# EAGLE board simdash (EAGLE 9.7.0)

Size 165.56 x 157.79 mm. Coordinates in mm from the lower left corner, seen from the top.
Outline: 0,0 165.56,0 165.56,157.79 0,157.79 0,0
Copper layers (1*16): Top 0.035mm / dielectric 1.5mm / Bottom 0.035mm
Design rules "default": minimum track width 6mil, minimum drill 0.35mm, track to track 6mil, track to pad 6mil, pad to pad 6mil, via to via 6mil, smd to smd 6mil, copper to edge 40mil, drill to drill 6mil, minimum pad ring 10mil, minimum via ring 8mil, stop-mask expansion 4mil, vias tented up to drill 0mil, thermal gap 10mil

## Footprints (pad centres in the part's own frame; a part is rotated, then mirrored left to right if it is on the bottom)
DIODE-AXIAL = drill 1: 1 -5.08,0; 2 5.08,0
7SEG-13 = drill 0.813 long: 1 -5.08,-7.62; 2 -2.54,-7.62; 3 0,-7.62; 4 2.54,-7.62; 5 5.08,-7.62; 6 5.08,7.62; 7 2.54,7.62; 8 0,7.62; 9 -2.54,7.62; 10 -5.08,7.62
MOTOR = drill 1.118 pad 3.15 octagon: + 2.54,0; - -2.54,0
RESAD1016W63L850D250B = drill 0.83 pad 1.43: 1 -5.08,0; 2 5.08,0
TO92 = drill 0.813 octagon: 1 -1.27,0; 2 0,1.905; 3 1.27,0
ARDUINO-UNO-R3-SHIELD = drill 1.016 pad 1.88: 3.3V 24.13,-2.54; 5V 24.13,0; A0 24.13,12.7; A1 24.13,15.24; A2 24.13,17.78; A3 24.13,20.32; A4 24.13,22.86; A5 24.13,25.4; AREF -24.13,-13.97; D2 -24.13,20.32; D3 -24.13,17.78; D4 -24.13,15.24; D5 -24.13,12.7; D6 -24.13,10.16; D7 -24.13,7.62; D8 -24.13,3.81; D9 -24.13,1.27; D10 -24.13,-1.27; D11 -24.13,-3.81; D12 -24.13,-6.35; D13 -24.13,-8.89; GND@0 24.13,2.54; GND@1 24.13,5.08; GND@2 -24.13,-11.43; IOREF 24.13,-7.62; NC 24.13,-10.16; RES 24.13,-5.08; RX -24.13,25.4; SCL -24.13,-19.05; SDA -24.13,-16.51; TX -24.13,22.86; VIN 24.13,7.62

## Placement (x,y rotation side)
D1  DIODEDIODE-AXIAL  [DIODE-AXIAL]  21.67,122.31 0 top
DIGIT1  7SEG-CA  [7SEG-13]  156.29,114.69 0 top
DIGIT2  7SEG-CA  [7SEG-13]  143.59,114.69 0 top
DIGIT3  7SEG-CA  [7SEG-13]  130.89,114.69 0 top
DIGIT4  7SEG-CA  [7SEG-13]  118.19,114.69 0 top
M1  MOTOR_HDR  [MOTOR]  27.77,149.53 0 top
R1  220  [RESAD1016W63L850D250B]  82.63,112.15 90 top
R3  220  [RESAD1016W63L850D250B]  87.71,112.15 90 top
R4  220  [RESAD1016W63L850D250B]  8.97,122.31 0 top
R5  220  [RESAD1016W63L850D250B]  77.55,112.15 90 top
T1  NPN  [TO92]  14.05,127.39 0 top
U1  ARDUINO-UNO-R3-SHIELD  [ARDUINO-UNO-R3-SHIELD]  89.19,29.84 270 top

## Library data of the parts
D1 M1 R1 R3-R5 U1 = Tinkercad
DIGIT1-DIGIT4 = Tinkercad; CATEGORY: Opto-Electronic; SUB-CATEGORY: Display; TYPE: 7-Segment
T1 = Tinkercad; CATEGORY: Transistor; SUB-CATEGORY: BJT; TYPE: NPN

## Nets
DIGIT2_F: DIGIT2.9 R5.2
DIGIT2_G: DIGIT2.10 R1.2
DIGIT3_CA2: DIGIT3.8 R3.2
M1_-: D1.1 M1.- T1.3
T1_B: R4.2 T1.2
U1_5V: D1.2 M1.+ U1.5V
U1_D2: DIGIT2.8 U1.D2
U1_D3: DIGIT2.2 U1.D3
U1_D4: DIGIT2.1 U1.D4
U1_D5: DIGIT3.5 U1.D5
U1_D6: DIGIT3.4 U1.D6
U1_D7: DIGIT2.3 U1.D7
U1_D8: DIGIT3.6 U1.D8
U1_D9: DIGIT3.7 U1.D9
U1_D10: R3.1 U1.D10
U1_D11: R1.1 U1.D11
U1_D12: R5.1 U1.D12
U1_D13: R4.1 U1.D13
U1_GND: T1.1 U1.GND@0 U1.GND@1 U1.GND@2

## Tracks (layer width: path | path; a pad name or v marks a point on that pad's centre or on a via)
DIGIT2_F  (1 unrouted)
DIGIT2_G  (1 unrouted)
DIGIT3_CA2  (1 unrouted)
M1_-  (2 unrouted)
T1_B  (1 unrouted)
U1_5V  (2 unrouted)
U1_D2  (1 unrouted)
U1_D3  (1 unrouted)
U1_D4  (1 unrouted)
U1_D5  (1 unrouted)
U1_D6  (1 unrouted)
U1_D7  (1 unrouted)
U1_D8  (1 unrouted)
U1_D9  (1 unrouted)
U1_D10  (1 unrouted)
U1_D11  (1 unrouted)
U1_D12  (1 unrouted)
U1_D13  (1 unrouted)
U1_GND  (3 unrouted)